# EAGLE board CNC-Hall Board (EAGLE 5.11)
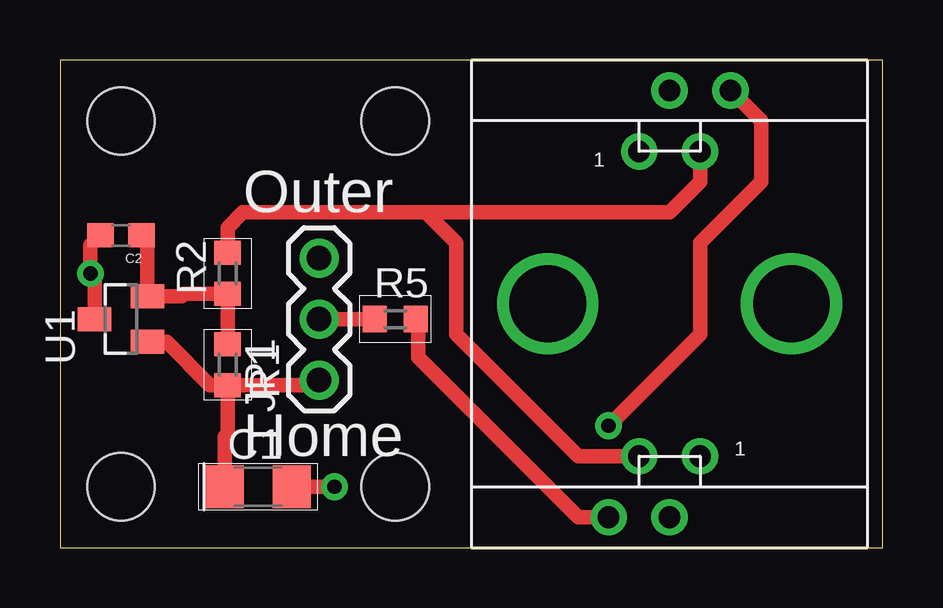
[diagram p0: board, top side]
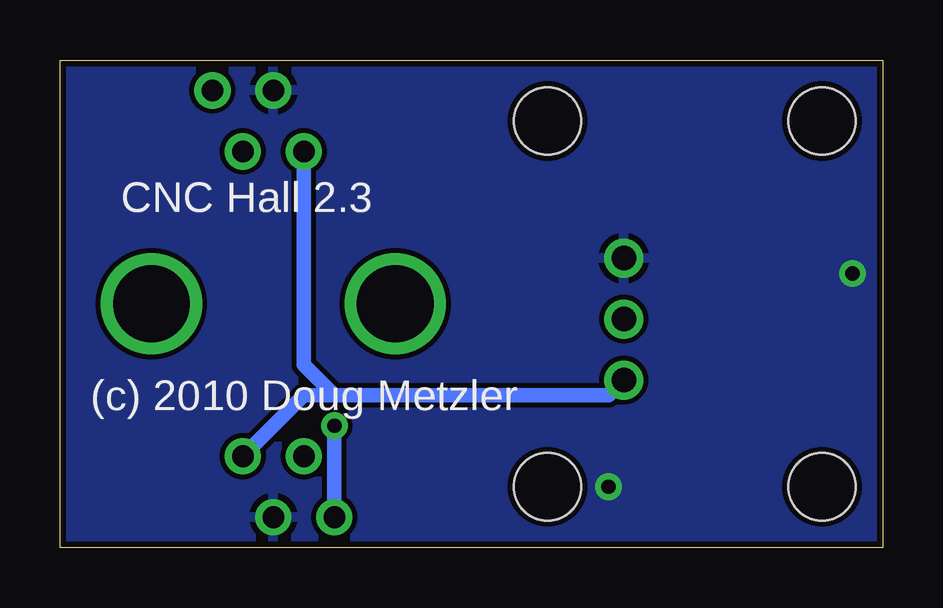
[diagram p1: board, bottom side, seen from below]

Size 34.29 x 20.32 mm. Coordinates in mm from the lower left corner, seen from the top.
Outline: 0,0 34.29,0 34.29,20.32 0,20.32 0,0
Copper layers (1*16): Top 0.035mm / dielectric 1.5mm / Bottom 0.035mm
Design rules "SparkFun": minimum track width 8mil, minimum drill 20mil, track to track 8mil, track to pad 8mil, pad to pad 8mil, via to via 8mil, smd to smd 8mil, copper to edge 10mil, drill to drill 8mil, minimum pad ring 12mil, minimum via ring 10mil, stop-mask expansion 4mil, vias tented up to drill 25mil, thermal gap 10mil
Holes 2.8 mm at 13.97,2.54 13.97,17.78 2.54,17.78 2.54,2.54

## Footprints (pad centres in the part's own frame; a part is rotated, then mirrored left to right if it is on the bottom)
C1206 = smd 1.6 x 1.8: 1 -1.4,0; 2 1.4,0
0603 = smd 1.1 x 1: 1 -0.85,0; 2 0.85,0
1X03 = drill 1.016 round: 1 0,0; 2 2.54,0; 3 5.08,0
R0603 = smd 1 x 1.1: 1 -0.85,0; 2 0.85,0
SOT23 = smd 1 x 1.4: 1 -0.95,-1.1; 2 0.95,-1.1; 3 0,1.1
RJ11-6P4C = drill 0.9 round: P$1_1 -1.27,6.35; P$1_2 0,8.89; P$1_3 1.27,6.35; P$1_4 2.54,8.89 | drill 3.2 round: P$98 5.08,0; P$99 -5.08,0

## Placement (x,y rotation side)
C1  0.1uF  [C1206]  8.25,2.54 0 top
C2  10p  [0603]  2.54,13.02 180 top
JP1  home/outer  [1X03]  10.8,6.99 90 top
R1  50k  [R0603]  6.98,7.62 270 top
R2  1k  [R0603]  6.98,11.43 90 top
R5  50k  [R0603]  13.97,9.53 0 top
U1  A3213_HALL  [SOT23]  2.54,9.53 90 top
U$3  RJ11-6P4C  [RJ11-6P4C]  25.4,10.16 0 top
U$4  RJ11-6P4C  [RJ11-6P4C]  25.4,10.16 180 top

## Library data of the parts
C1 C2 = DougM.capacitor
JP1 U$3 U$4 = DougM.connector
R1 R2 R5 = DougM.resistor
U1 = DougM

## Nets
5V: C1.1 JP1.1 R1.2 U1.1 U$3.P$1_1 U$4.P$1_1
GND: C1.2 C2.2 JP1.3 U1.3 U$3.P$1_2 U$4.P$1_2
N$2: C2.1 R1.1 R2.1 U1.2
N$3: R2.2 U$3.P$1_3 U$4.P$1_3
N$9: JP1.2 R5.1
N$11: R5.2 U$3.P$1_4 U$4.P$1_4

## Tracks (layer width: path | path; a pad name or v marks a point on that pad's centre or on a via)
5V
  Top 0.61: R1.2 6.25,6.77 4.45,8.57 U1.1 | R1.2 10.58,6.77 JP1.1 | R1.2 6.98,4.76 6.86,4.63 C1.1
  Bottom 0.61: U$4.P$1_1 24.13,6.35 22.86,6.35 | 22.86,6.35 11.43,6.35 JP1.1 | U$3.P$1_1 24.13,7.62 22.86,6.35
GND  (via drill 0.6)
  Top 0.61: U1.3 1.44,11.26 v1.27,11.43 1.27,12.6 C2.2 | C1.2 v11.43,2.54
  pour Bottom: 0,20.32 34.29,20.32 34.29,0 0,0
N$2
  Top 0.61: C2.1 3.64,12.77 U1.2 5.08,10.48 5.18,10.58 R2.1 R1.1
N$3
  Top 0.61: U$3.P$1_3 26.67,15.24 25.4,13.97 15.24,13.97 | 15.24,13.97 7.62,13.97 6.98,13.34 R2.2 | U$4.P$1_3 21.59,3.81 16.51,8.89 16.51,12.7 15.24,13.97
N$9
  Top 0.61: JP1.2 R5.1
N$11  (via drill 0.6)
  Top 0.61: U$4.P$1_4 21.59,1.27 14.92,7.94 14.92,9.42 R5.2 | v22.86,5.08 26.67,8.89 26.67,12.7 29.21,15.24 29.21,17.78 U$3.P$1_4
  Bottom 0.61: U$4.P$1_4 v22.86,5.08

## Text on the board
tPlace: Outer | Home
bPlace: CNC Hall 2.3 | (c) 2010 Doug Metzler